# Altium PCB IRIS2_PCB_CPU.PcbDoc (part 2 of 2)
Units mil, origin at the board's own origin, x right, y up, seen from the top; angles counter-clockwise.
Board outline 3935 x 3935 mil, 4 copper layers (Top Layer, GND, Power, Bottom Layer), stack 67.17 mil thick; 109 components, 87 nets, 432 pads, 298 vias.
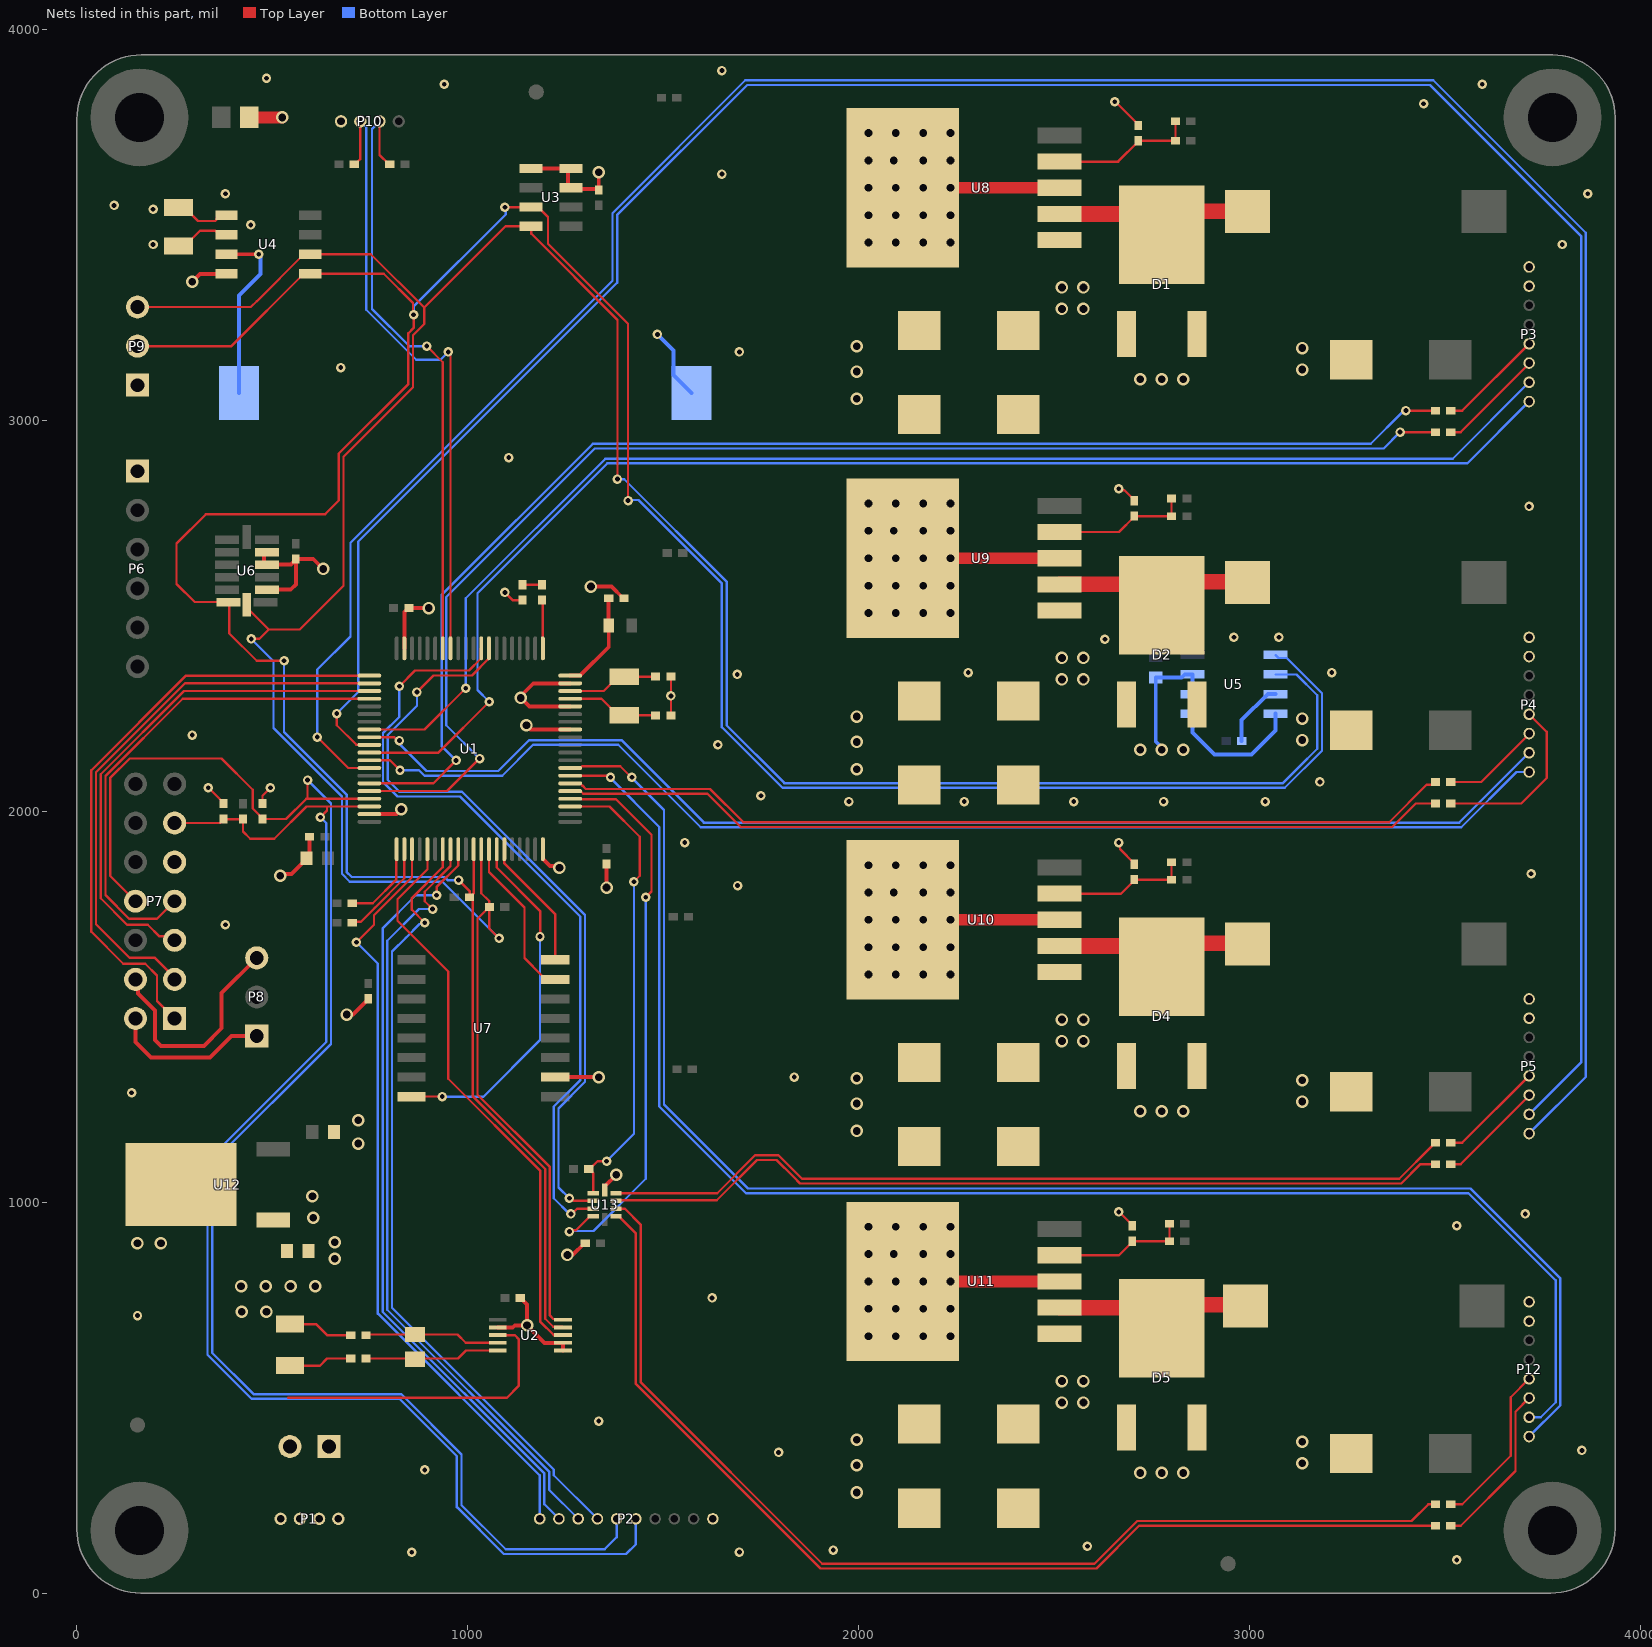
[diagram p4: the nets of this part, all layers, seen from the top]

## Via types
v1: diameter 32, hole 19.68, Top Layer to Bottom Layer, tented both sides, 175 vias
v2: diameter 24.2, hole 12.2, Top Layer to Bottom Layer, tented both sides, 123 vias

## Nets (pads, with @x,y where several pads share a name; then routed paths per layer and width w, separated by ;. In a path a pad name is that pad's centre, name@x,y a point inside that pad or via, vN(x,y) a via of type N, cw(c..) or ccw(c..) an arc to the next point about the centre after c; other vN are vias at no path point) (continued)
GND: C1.2 C2.2 C4.2 C5.2 C6.2 C7.2 C8.1 C9.1 C10.2 C11.2 C12.2 C13.2 C14.2 C15.2 C16.2 C17.2 C18.2 C19.2 C20.2 C21.2 C22.2 C23.2 C24.2 C25.2 C26.2 C27.2 C28.2 C29.2 D1.1 D1.3 D2.1 D2.3 D3.1 D4.1 D4.3 D5.1 D5.3 P1.1 P1.2 P1B.1 P2.1 P3.1 P3.2 P4.1 P4.2 P5.1 P5.2 P6.1 P7.9 P9.1 P10.1 P11.1 P12.1 P12.2 R10.2 R24.1 R29.1 R31.1 R33.1 R35.1 U1.19 U1.39 U1.60 U1.73 U1.76 U1.79 U2.1 U2.2 U2.7 U3.3 U3.4 U3.5 U4.4 U5.4 U5.5 U5.6 U5.7 U6.2 U6.4 U6.5 U7.10 U8.3 U8.6 U9.3 U9.6 U10.3 U10.6 U11.3 U11.6 U12.4 U13.5 | length 12999.6
  Top Layer w6: v2@335,2060 336.65,2060 375,2021.65 C16.2@375,2019.69 ; R10.2@475,2019.69 475,2040 v2(495,2060) ; v1@657.5,855 v1(660,855) ; v2(1095,2560) 1114.68,2540.32 D3.1@1140,2540.32 ; C19.2@1519.69,2245 C18.2@1519.69,2345 ; v1(2025,657.36) U11.6@2130,762.36 ; v1(2025,727.36) 2060,762.36 2095,762.36 U11.6@2130,797.36 ; v1(2025,797.36) v1(2095,797.36) ; v1(2025,867.36) v1(2095,797.36) ; v1(2025,937.36) 2057.5,904.86 2057.5,869.86 U11.6@2090,837.36 ; v1(2025,1582.36) U10.6@2130,1687.36 ; v1(2025,1652.36) 2060,1687.36 2095,1687.36 U10.6@2130,1722.36 ; v1(2025,1722.36) v1(2095,1722.36) ; v1(2025,1792.36) v1(2095,1722.36) ; v1(2025,1862.36) 2057.5,1829.86 2057.5,1794.86 U10.6@2090,1762.36 ; v1(2025,2507.36) U9.6@2130,2612.36 ; v1(2025,2577.36) 2060,2612.36 2095,2612.36 U9.6@2130,2647.36 ; v1(2025,2647.36) v1(2095,2647.36) ; v1(2025,2717.36) v1(2095,2647.36) ; v1(2025,2787.36) 2057.5,2754.86 2057.5,2719.86 U9.6@2090,2687.36 ; v1(2025,3455) U8.6@2130,3560 ; v1(2025,3525) 2060,3560 2095,3560 U8.6@2130,3595 ; v1(2025,3595) v1(2095,3595) ; v1(2025,3665) v1(2095,3595) ; v1(2025,3735) 2057.5,3702.5 2057.5,3667.5 U8.6@2090,3635 ; v1(2090,867.36) U11.6@2090,837.36 ; v1(2090,1792.36) U10.6@2090,1762.36 ; v1(2090,2717.36) U9.6@2090,2687.36 ; v1(2090,3665) U8.6@2090,3635 ; v1(2095,657.36) 2130,692.36 U11.6@2130,762.36 ; v1(2095,937.36) U11.6@2095,832.36 ; v1(2095,1582.36) 2130,1617.36 U10.6@2130,1687.36 ; v1(2095,1862.36) U10.6@2095,1757.36 ; v1(2095,2507.36) 2130,2542.36 U9.6@2130,2612.36 ; v1(2095,2787.36) U9.6@2095,2682.36 ; v1(2095,3455) 2130,3490 U8.6@2130,3560 ; v1(2095,3735) U8.6@2095,3630 ; v1(2165,727.36) U11.6@2165,762.36 ; v1(2165,797.36) v1(2235,727.36) ; v1(2165,937.36) 2130,902.36 U11.6@2130,832.36 ; v1(2165,1652.36) U10.6@2165,1687.36 ; v1(2165,1722.36) v1(2235,1652.36) ; v1(2165,1862.36) 2130,1827.36 U10.6@2130,1757.36 ; v1(2165,2577.36) U9.6@2165,2612.36 ; v1(2165,2647.36) v1(2235,2577.36) ; v1(2165,2787.36) 2130,2752.36 U9.6@2130,2682.36 ; v1(2165,3525) U8.6@2165,3560 ; v1(2165,3595) v1(2235,3525) ; v1(2165,3735) 2130,3700 U8.6@2130,3630 ; U11.6@2170,657.36 U11.6@2170,757.36 ; U10.6@2170,1582.36 U10.6@2170,1682.36 ; U9.6@2170,2507.36 U9.6@2170,2607.36 ; U8.6@2170,3455 U8.6@2170,3555 ; v1(2235,867.36) 2200,832.36 2165,832.36 U11.6@2130,797.36 ; v1(2235,937.36) U11.6@2130,832.36 ; v1(2235,1792.36) 2200,1757.36 2165,1757.36 U10.6@2130,1722.36 ; v1(2235,1862.36) U10.6@2130,1757.36 ; v1(2235,2717.36) 2200,2682.36 2165,2682.36 U9.6@2130,2647.36 ; v1(2235,2787.36) U9.6@2130,2682.36 ; v1(2235,3665) 2200,3630 2165,3630 U8.6@2130,3595 ; v1(2235,3735) U8.6@2130,3630 ; U11.6@2240,657.36 2205,692.36 2205,722.36 U11.6@2170,757.36 ; U10.6@2240,1582.36 2205,1617.36 2205,1647.36 U10.6@2170,1682.36 ; U9.6@2240,2507.36 2205,2542.36 2205,2572.36 U9.6@2170,2607.36 ; U8.6@2240,3455 2205,3490 2205,3520 U8.6@2170,3555 ; v2(2655,3815) 2656.65,3815 2715,3756.65 R29.1@2715,3754.68 ; v2(2665,975) 2666.34,975 2699.69,941.65 R35.1@2699.69,939.68 ; v2(2665,1920) 2668.48,1916.52 2668.48,1903.17 2705,1866.65 R33.1@2705,1864.68 ; v2(2665,2825) 2668.48,2821.52 2680.14,2821.52 2705,2796.65 R31.1@2705,2794.68 ; U11.6@2090,837.36 U11.6@2095,832.36 ; U10.6@2090,1762.36 U10.6@2095,1757.36 ; U9.6@2090,2687.36 U9.6@2095,2682.36 ; U8.6@2090,3635 U8.6@2095,3630 ; v1(2095,797.36) U11.6@2130,797.36 ; U11.6@2095,832.36 U11.6@2130,797.36 ; v1(2095,1722.36) U10.6@2130,1722.36 ; U10.6@2095,1757.36 U10.6@2130,1722.36 ; v1(2095,2647.36) U9.6@2130,2647.36 ; U9.6@2095,2682.36 U9.6@2130,2647.36 ; v1(2095,3595) U8.6@2130,3595 ; U8.6@2095,3630 U8.6@2130,3595 ; U11.6@2130,762.36 U11.6@2130,797.36 ; U11.6@2130,797.36 U11.6@2165,762.36 ; U11.6@2130,797.36 U11.6@2130,832.36 ; U10.6@2130,1687.36 U10.6@2130,1722.36 ; U10.6@2130,1722.36 U10.6@2165,1687.36 ; U10.6@2130,1722.36 U10.6@2130,1757.36 ; U9.6@2130,2612.36 U9.6@2130,2647.36 ; U9.6@2130,2647.36 U9.6@2165,2612.36 ; U9.6@2130,2647.36 U9.6@2130,2682.36 ; U8.6@2130,3560 U8.6@2130,3595 ; U8.6@2130,3595 U8.6@2130,3630 ; U8.6@2130,3595 U8.6@2165,3560 ; U11.6@2165,762.36 U11.6@2170,757.36 ; U10.6@2165,1687.36 U10.6@2170,1682.36 ; U9.6@2165,2612.36 U9.6@2170,2607.36 ; U8.6@2165,3560 U8.6@2170,3555
  Top Layer w10: v1(295,3355) 315,3375 U4.4@382.72,3375 ; U6.2@478.31,2567.17 547.17,2567.17 560,2580 C6.2@560,2643.35 ; U6.5@478.31,2662.83 478.31,2630.94 547.6,2630.94 C6.2@560,2643.35 ; v1(520,1835) 524.21,1839.21 548.62,1839.21 587.44,1878.03 C12.2@587.44,1880 595.31,1887.87 C13.2@595.31,1935 ; v1(630,2620) 604.69,2645.31 C6.2@560,2645.31 C6.2@560,2643.35 ; v1(690,1480) 706.65,1480 745,1518.35 C25.2@745,1520.31 ; U1.39@748.11,1992.68 817.68,1992.68 v1(830,2005) ; U1.19@837.68,2416.89 837.68,2510.28 847.4,2520 C23.2@849.37,2520 v1(900,2520) ; U2.7@1076.34,679.68 1115.06,679.68 1120.22,684.84 v1(1151.54,684.84) ; C8.1@1134.37,755 1136.34,755 1141.18,750.16 1141.18,748.19 1151.54,737.83 v1(1151.54,684.84) ; v1(1150,2220) 1160.79,2209.21 U1.73@1261.89,2209.21 ; U3.5@1170,3644.21 1256.61,3644.21 1256.61,3595 1259.27,3592.34 1332.34,3592.34 C1.2@1335,3589.69 v1(1335,3635) ; U1.60@1192.01,1903.11 1192.01,1877.68 1209.95,1859.73 1230.27,1859.73 v1(1234.48,1855.52) ; U7.10@1224.06,1320 v1(1335,1320) ; U2.1@1243.66,620.63 U2.2@1243.66,640.31 1196.07,640.31 v1(1151.54,684.84) ; v1(1255,865) 1268.35,865 1298.35,895 C26.2@1300.31,895 ; U1.76@1261.89,2268.27 1157.48,2268.27 1135.75,2290 v1(1135.38,2290) 1135.38,2295.38 1167.32,2327.32 U1.79@1261.89,2327.32 ; v1(1315,2575) 1367.72,2575 1397.72,2545 C20.2@1399.69,2545 ; U13.5@1350,1030.87 1350,1040.31 1379.69,1070 v1(1380,1070) ; v1(1355,1805) C11.2@1355,1865.31
  Top Layer w30: R24.1@440.43,3775 v1(525,3775) ; U11.6@2130,797.36 v1(2165,797.36) U11.3@2531.57,797.36 ; U10.6@2130,1722.36 v1(2165,1722.36) U10.3@2531.57,1722.36 ; U9.6@2130,2647.36 v1(2165,2647.36) U9.3@2531.57,2647.36 ; U8.6@2130,3595 v1(2165,3595) U8.3@2531.57,3595 ; U11.6@2165,782.36 U11.6@2235,782.36 ; U10.6@2165,1707.36 U10.6@2235,1707.36 ; U9.6@2165,2632.36 U9.6@2235,2632.36 ; U8.6@2165,3580 U8.6@2235,3580
  Bottom Layer w10: v2(1485,3220) 1526.3,3178.7 1526.3,3116.18 P11.1@1572.48,3070 ; v1(2775,2157.36) 2775,2163.32 2760,2178.32 C2.2@2760,2342.44 2826.46,2342.44 2834.02,2350 U5.7@2853.7,2350 U5.6@2853.7,2300 U5.5@2853.7,2250 2853.7,2201.3 2910,2145 3005,2145 3066.3,2206.3 U5.4@3066.3,2250
  other v1: 1995,257.36 2720,307.36 2775,307.36 2830,307.36 1995,327.36 3135,332.36 3135,387.36 1995,392.36 2165,657.36 2235,657.36 2095,727.36 2235,797.36 2165,867.36 155,895 215,895 660,897.5 720,1150 1995,1182.36 720,1210 2720,1232.36 2775,1232.36 2830,1232.36 1995,1252.36 3135,1257.36 3135,1312.36 1995,1317.36 2165,1582.36 2235,1582.36 2095,1652.36 2235,1722.36 2165,1792.36 1995,2107.36 2720,2157.36 2830,2157.36 1995,2177.36 3135,2182.36 3135,2237.36 1995,2242.36 2165,2507.36 2235,2507.36 2095,2577.36 2235,2647.36 2165,2717.36 1995,3055 2720,3105 2775,3105 2830,3105 1995,3125 3135,3130 3135,3185 1995,3190 2165,3455 2235,3455 2095,3525 2235,3595 2165,3665
  other v2: 3530,85 856.88,104.26 1695,105 1935,110 2585,120 890,315 1795,360 3850,365 1335,440 155,710 1625,755 3530,940 3705,970 140,1280 1835,1320 380,1710 1690,1810 3720,1840 1555,1920 1975,2025 2270,2025 2550,2025 2780,2025 3040,2025 1750,2040 335.83,2060 3180,2075 1640,2170 295,2195 1519.69,2295 1689.1,2350 2280,2355 3210,2355 2630,2440 2960,2445 3075,2445 3715,2780 1105,2905 675,3135 1695,3175 195,3450 3800,3450 445,3500 195,3540 95,3550 380,3580 3865,3580 1650,3630 3445,3810 940,3860 3595,3860 485,3875 1650,3895
I2C_Ext_SCL: P10.3 R22.2 U1.14 | length 1579.4
  Top Layer w6: P10.3@774.21,3765 774.21,3679.13 798.35,3655 R22.2@800.31,3655 ; v2(895,3190) 936.1,3148.9 U1.14@936.1,2416.89
  Bottom Layer w6: P10.3@774.21,3765 774.21,3764.43 755,3745.21 755,3285 850,3190 v2(895,3190)
I2C_Ext_SDA: P10.2 R23.2 U1.13 | length 1637.5
  Top Layer w6: R23.2@709.69,3655 711.65,3655 725,3668.35 P10.2@725,3765 ; v2(950,3175) 950,3170.07 955.79,3164.29 U1.13@955.79,2416.89
  Bottom Layer w6: P10.2@725,3765 740,3749.97 740,3283.03 868.03,3155 930,3155 v2(950,3175)
I2C_SCK: P9.3 R2.2 U1.52 U2.5 U3.8 U4.6 U5.2 U6.14 | length 8328.9
  Top Layer w6: P9.3@155,3290 445,3290 460,3305 460.55,3305 580.55,3425 U4.6@597.28,3425 751.97,3425 888.49,3288.49 ; U6.14@435,2520.61 442.83,2512.78 490.61,2465 ; v2(445.98,2440.98) 446.48,2441.48 467.09,2441.48 490.61,2465 ; U1.52@1034.53,1903.11 1034.53,1790.47 1054.67,1770.33 1054.67,1754.84 R2.2@1055,1754.52 ; v2(1080,1675) 1055,1700 1055,1755 1025,1725 1025,1275 1210,1090 1210,710 1218.71,701.29 1241.74,701.29 U2.5@1243.66,699.37 ; v2(1382.9,2850) 1382.9,3257.1 1162.13,3477.87 U3.8@1162.13,3496.57 1096.57,3496.57 888.49,3288.49 ; 490.61,2465 570,2465 682,2577 682,2907 860,3085 860,3218 888.49,3246.49 888.49,3288.49
  Bottom Layer w6: v2(445.98,2440.98) 502.9,2384.07 502.9,2213.16 678,2038.06 678,1840.03 698.03,1820 935,1820 1027.42,1727.58 v2(1080,1675) ; v2(1382.9,2850) 1383.27,2849.63 1400.37,2849.63 1662,2588 1662,2219.97 1809.97,2072 3085.03,2072 3125.03,2112 3173,2159.97 3173,2297 3120,2350 U5.2@3066.3,2350
I2C_SDA: P9.2 R3.2 U1.51 U2.4 U3.7 U4.5 U5.1 U6.13 | length 8617.7
  Top Layer w6: P9.2@155,3190 395.55,3190 580.55,3375 U4.5@597.28,3375 785,3375 860,3300 860,3271.38 v2(861.38,3270) 861.38,3236.35 848,3222.97 848,3093 670,2915 670,2795 635,2760 330,2760 255,2685 255,2581.67 301.4,2535.28 395.63,2535.28 390,2529.65 390,2455 460,2385 v2(530,2385) ; v2(976.38,1824.02) 1004.69,1795.71 R3.2@1004.69,1780 R3.2@1006.65,1780 ; U1.51@1014.84,1903.11 1014.84,1790.36 1013.5,1789.01 1013.5,1786.84 R3.2@1006.65,1780 ; v2(1095,3545) U3.7@1162.13,3545 ; U3.7@1162.13,3545.79 U3.7@1162.13,3545 ; U2.4@1243.66,679.68 1241.74,681.61 1218.39,681.61 1198,702 1198,1085.03 1013,1270.03 1013,1773.65 R3.2@1006.65,1780 ; v2(1410,2795) 1410,3246.97 1205,3451.97 1205,3520.63 1188.65,3536.98 1180.63,3545 U3.7@1162.13,3545
  Bottom Layer w6: v2(530,2385) 530,2203.03 690,2043.03 690,1845 703,1832 939.97,1832 947.95,1824.02 v2(976.38,1824.02) ; v2(861.38,3270) 861.38,3291.38 1097.41,3527.41 1097.41,3542.59 v2(1095,3545) ; v2(1410,2795) 1411.51,2796.51 1436.51,2796.51 1650,2583.03 1650,2215 1805,2060 3090,2060 3185,2155 3185,2301.97 3094.8,2392.17 3074.13,2392.17 U5.1@3066.3,2400
JTAG_TCK: P7.7 U1.24 | length 1282.3
  Top Layer w6: P7.7@250,1770 205,1725 133.54,1725 73,1785.54 73,2089.97 270.98,2287.95 U1.24@748.11,2287.95
JTAG_TDI: P7.3 U1.22 | length 1444.6
  Top Layer w6: P7.3@250,1570 250,1575 200,1625 135,1625 49,1711 49,2099.91 276.41,2327.32 U1.22@748.11,2327.32
JTAG_TDO: P7.1 U1.21 | length 1567.5
  Top Layer w6: P7.1@250,1470 205,1515 205,1580 175,1610 118.63,1610 37,1691.63 37,2104.88 279.13,2347.01 U1.21@748.11,2347.01
JTAG_TMS: P7.5 U1.23 | length 1326.1
  Top Layer w6: P7.5@250,1670 240.02,1679.98 211.47,1679.98 181.46,1710 128.57,1710 61,1777.57 61,2094.94 273.7,2307.64 U1.23@748.11,2307.64
LED_BLUE: P2.9 U1.49 | length 2011.2
  Top Layer w6: v2(920,1785) 920.14,1785.14 920.14,1806.1 975.47,1861.44 U1.49@975.47,1903.11
  Bottom Layer w6: v2(920,1785) 867,1785 782,1700 782,719.97 1195.94,306.03 1195.94,227.21 P2.9@1233.15,190
LED_GREEN: P2.8 U1.48 | length 2019.5
  Top Layer w6: v2(910,1750) 890,1770 890,1794.06 955.79,1859.85 U1.48@955.79,1903.11
  Bottom Layer w6: v2(910,1750) 875,1750 794,1669 794,724.94 1207.94,311 1207.94,264.43 P2.8@1282.36,190
LED_RED: P2.7 U1.47 | length 2017.9
  Top Layer w6: v2(890,1715) 856.99,1748.01 856.99,1778.01 936.1,1857.13 U1.47@936.1,1903.11
  Bottom Layer w6: v2(890,1715) 886.52,1711.52 876.52,1711.52 841.26,1676.26 806,1641 806,729.91 1219.94,315.97 1219.94,301.64 P2.7@1331.57,190
LFXIN: C19.1 U1.77 Y2.1 | length 236.2
  Top Layer w6: U1.77@1261.89,2287.95 1342.09,2287.95 1384.25,2245.79 Y2.1@1400,2245.79 1479.53,2245.79 C19.1@1480.32,2245
LFXOUT: C18.1 U1.78 Y2.2 | length 233.9
  Top Layer w6: U1.78@1261.89,2307.64 1347.68,2307.64 1384.25,2344.21 Y2.2@1400,2344.21 1479.53,2344.21 C18.1@1480.32,2345
NetC3_1: C3.1 R5.1 U2.10 | length 346.4
  Top Layer w6: R5.1@739.68,600 863.5,600 C3.1@865,598.5 866.5,600 975,600 995.63,620.63 U2.10@1076.34,620.63
NetC3_2: C3.2 R6.1 U2.9 | length 346
  Top Layer w6: R6.1@739.68,660 741.18,661.5 C3.2@865,661.5 973.5,661.5 994.69,640.31 U2.9@1076.34,640.31
NetC20_1: C20.1 R11.2 U1.80 | length 253.8
  Top Layer w10: U1.80@1261.89,2347.01 1287.32,2347.01 1360.47,2420.16 R11.2@1360.47,2475 1360.39,2475.08 1360.39,2544.92 C20.1@1360.32,2545
NetC30_2: C30.2 R29.2 R30.2 U8.4 | length 369.6
  Top Layer w6: U8.4@2514.09,3661.93 2663.58,3661.93 2715,3713.35 R29.2@2715,3715.31 2810,3715.31 R30.2@2810.31,3715 C30.2@2810.31,3765
NetC31_2: C31.2 R31.2 R32.2 U9.4 | length 349.5
  Top Layer w6: U9.4@2514.09,2714.29 2665.95,2714.29 2705,2753.35 R31.2@2705,2755.31 2705.32,2755 R32.2@2800.31,2755 C31.2@2800.31,2800
NetC32_2: C32.2 R33.2 R34.2 U10.4 | length 347.4
  Top Layer w6: U10.4@2514.09,1789.29 2670.95,1789.29 2705,1823.35 R33.2@2705,1825.31 2705.32,1825 R34.2@2800.31,1825 C32.2@2800.31,1870
NetC33_2: C33.2 R35.2 R36.2 U11.4 | length 342.1
  Top Layer w6: U11.4@2514.09,864.29 2665.63,864.29 2699.69,898.35 R35.2@2699.69,900.31 2794.69,900.31 R36.2@2795,900 C33.2@2795,945
NetD1_4: D1.4 L1.2 U8.2 | length 419.4
  Top Layer w40: U8.2@2514.09,3528.07 D1.4@2678.66,3528.07 ; D1.4@2775,3475 2835,3535 L1.2@3005,3535
NetD2_4: D2.4 L2.2 U9.2 | length 419.4
  Top Layer w40: U9.2@2514.09,2580.43 D2.4@2678.66,2580.43 ; D2.4@2775,2527.36 2835,2587.36 L2.2@3005,2587.36
NetD3_2: D3.2 R12.1 | length 50
  Top Layer w6: D3.2@1140,2579.69 R12.1@1190,2579.68
NetD4_4: D4.4 L3.2 U10.2 | length 419.4
  Top Layer w40: U10.2@2514.09,1655.43 D4.4@2678.66,1655.43 ; D4.4@2775,1602.36 2835,1662.36 L3.2@3005,1662.36
NetD5_4: D5.4 L4.2 U11.2 | length 419.4
  Top Layer w40: U11.2@2514.09,730.43 D5.4@2678.66,730.43 ; D5.4@2775,677.36 2835,737.36 L4.2@3005,737.36
NetP1_3: P1.3 P1.4 P1B.2 R1.1 R5.2 U2.8 | length 943.1
  Top Layer w6: 540,500 1100,500 1130,530 1130,650 1120,660 U2.8@1076.34,660 ; R1.1@545,581.85 621.85,581.85 640,600 R5.2@700.31,600
NetP3_5: P3.5 R16.2 | length 271.1
  Top Layer w6: R16.2@3514.69,3025 3544.21,3025 P3.5@3715,3195.79
NetP3_6: P3.6 R17.2 | length 275
  Top Layer w6: R17.2@3514.69,2970 3540,2970 P3.6@3716.57,3146.57
NetP4_5: P4.5 R18.2 | length 454
  Top Layer w6: R18.2@3514.69,2020 3695,2020 3760,2085 3760,2203.15 P4.5@3715,2248.15
NetP4_6: P4.6 R19.2 | length 253.2
  Top Layer w6: R19.2@3514.69,2075 3592.64,2075 P4.6@3716.57,2198.94
NetP5_5: P5.5 R20.2 | length 271.1
  Top Layer w6: R20.2@3514.69,1152.36 3544.21,1152.36 P5.5@3715,1323.15
NetP5_6: P5.6 R21.2 | length 275
  Top Layer w6: R21.2@3514.69,1097.36 3540,1097.36 P5.6@3716.57,1273.94
NetP7_2: P7.2 P8.1 | length 409.4
  Top Layer w10: P7.2@150,1470 150,1410 190,1370 340,1370 395,1425 P8.1@460,1425
NetP7_4: P7.4 P8.3 | length 587.8
  Top Layer w10: P7.4@150,1570 156.49,1563.51 156.49,1533.51 200,1490 200,1415 215,1400 325,1400 370,1445 370,1535 P8.3@460,1625
NetP11_2: P11.2 U4.3 | length 462.1
  Top Layer w10: U4.3@382.72,3425 v2(465,3425)
  Bottom Layer w10: P11.2@415,3070 415,3320 470,3375 470,3420 v2(465,3425)
NetP12_5: P12.5 R27.2 | length 421.1
  Top Layer w6: R27.2@3514.69,227.36 3544.21,227.36 3668,351.15 3668,501.15 P12.5@3715,548.15
NetP12_6: P12.6 R28.2 | length 424.4
  Top Layer w6: R28.2@3514.69,172.36 3540,172.36 3680,312.36 3680,463.94 P12.6@3715,498.94
NetR4_2: R4.2 U5.3 | length 167.4
  Bottom Layer w10: R4.2@2979.69,2180 2979.69,2233.07 3046.61,2300 U5.3@3066.3,2300
NetR12_2: R12.2 U1.1 | length 124.3
  Top Layer w6: R12.2@1190,2540.31 1192.01,2538.31 U1.1@1192.01,2416.89
NetR14_1: R14.1 U1.42 | length 248.1
  Top Layer w6: R14.1@710,1717.54 726.48,1717.54 761.94,1753 837.68,1828.74 U1.42@837.68,1903.11
NetR15_1: R15.1 U1.41 | length 215.7
  Top Layer w6: R15.1@704.68,1765 756.97,1765 817.26,1825.29 817.26,1902.38 U1.41@817.99,1903.11
NetU4_1: U4.1 Y1.1 | length 144.7
  Top Layer w6: Y1.1@260,3544.21 275.75,3544.21 309.96,3510 353.66,3510 357.17,3513.51 357.17,3516.19 365.98,3525 U4.1@382.72,3525
NetU4_2: U4.2 Y1.2 | length 143.1
  Top Layer w6: Y1.2@260,3445.79 275.75,3445.79 314.96,3485 353.66,3485 354.85,3483.81 373.91,3483.81 U4.2@382.72,3475
POWER_ALERT: U1.45 U2.3 | length 1464.2
  Top Layer w6: U1.45@896.73,1903.11 896.73,1851.73 820,1775 820,1720 950,1590 950,1316.06 1185,1081.06 1185,695 1220,660 U2.3@1243.66,660
POWERCAM01_BUTTON: P3.7 U1.28 | length 3469.5
  Top Layer w6: U1.28@748.11,2209.21 889.23,2209.21 v2(995,2314.98)
  Bottom Layer w6: v2(995,2314.98) 995,2545 1352,2902 3519.64,2902 P3.7@3715,3097.36
POWERCAM01_STATUS: P3.8 U1.31 | length 3544.1
  Top Layer w6: U1.31@748.11,2150.16 925.16,2150.16 v2(1055,2280)
  Bottom Layer w6: v2(1055,2280) 1025,2310 1025,2558.03 1356.97,2890 3556.85,2890 P3.8@3715,3048.15
POWERCAM02_BUTTON: P4.7 U1.29 | length 3202.2
  Top Layer w6: U1.29@748.11,2189.53 811.53,2189.53 820.07,2180.99 v2(825,2180.99)
  Bottom Layer w6: v2(825,2180.99) 825,2171.97 894.07,2102.9 1077.9,2102.9 1157,2182 1393,2182 1604,1971 3536.28,1971 P4.7@3715,2149.72
POWERCAM02_STATUS: P4.8 U1.32 | length 3162.1
  Top Layer w6: U1.32@748.11,2130.47 801.06,2130.47 v2(826.53,2105)
  Bottom Layer w6: v2(826.53,2105) 875,2105 889.1,2090.9 1087.9,2090.9 1167,2170 1385,2170 1596,1959 3541.25,1959 3682.76,2100.51 P4.8@3715,2100.51
POWERCAM03_BUTTON: P5.7 U1.30 | length 6771.8
  Top Layer w6: v2(665,2250) 665,2220 714.99,2170.01 747.95,2170.01 U1.30@748.11,2169.84
  Bottom Layer w6: v2(665,2250) 720,2305 720,2690 1382,3352 1382,3525.03 1714.97,3858 3461.51,3858 3848,3471.51 3848,1357.72 P5.7@3715,1224.72
POWERCAM03_STATUS: P5.8 U1.33 | length 6975.6
  Top Layer w6: v2(615,2190) 694.21,2110.79 U1.33@748.11,2110.79
  Bottom Layer w6: v2(615,2190) 615,2362.5 700,2447.5 700,2686.97 1370,3356.97 1370,3530 1710,3870 3470,3870 3860,3480 3860,1320.51 P5.8@3715,1175.51
POWERCAM04_BUTTON: P12.7 U1.67 | length 3871.9
  Top Layer w6: U1.67@1261.89,2091.1 1354.05,2091.1 1354.56,2090.59 1361.59,2090.59 v2(1365.07,2087.1)
  Bottom Layer w6: v2(1365.07,2087.1) 1365.07,2084.93 1490,1960 1490,1245 1712,1023 3560.03,1023 3783,800.03 3783,488 3744.72,449.72 P12.7@3715,449.72
POWERCAM04_STATUS: P12.8 U1.68 | length 3957.4
  Top Layer w6: U1.68@1261.89,2110.79 1288.52,2110.79 1292.73,2115 1390,2115 1417.9,2087.1 v2(1420,2087.1)
  Bottom Layer w6: v2(1420,2087.1) 1420,2085 1502,2003 1502,1249.97 1716.97,1035 3565,1035 3795,805 3795,480.51 P12.8@3715,400.51
SBWTCK: P2.6 P7.8 R10.1 U1.37 | length 4183.4
  Top Layer w6: P7.8@150,1770 85,1835 85,2085 135,2135 370,2135 450,2055 450,2007.28 475,1982.28 R10.1@475,1980.32 535.32,1980.32 587.05,2032.05 U1.37@748.11,2032.05 ; 590,2032.05 v2(590,2080)
  Bottom Layer w6: v2(590,2080) 650,2020 650,1405 346,1101 346,614.91 451.91,509 829.94,509 984,354.94 984,224.94 1096.94,112 1350,112 1380.79,142.79 P2.6@1380.79,190
SBWTDIO: C16.1 P2.5 P7.11 R9.2 U1.38 | length 3576.7
  Top Layer w6: P7.11@250,1970 366.65,1970 375.31,1978.66 375.31,1980 R9.2@425,1980 425,1948.51 443.51,1930 505,1930 587.36,2012.36 640,2012.36 ; v2(622.9,1985) 640,2002.1 640,2012.36 ; U1.38@748.11,2012.36 640,2012.36
  Bottom Layer w6: v2(622.9,1985) 638,1969.9 638,1409.97 334,1105.97 334,609.94 446.94,497 824.97,497 972,349.97 972,219.97 1091.97,100 1405,100 1430,125 P2.5@1430,190
SPI_CLK: U1.55 U7.16 | length 337.2
  Top Layer w6: U1.55@1093.58,1903.11 1093.58,1866.42 1224.06,1735.94 U7.16@1224.06,1620
SPI_SIMO: U1.53 U7.15 | length 417.9
  Top Layer w6: U1.53@1054.21,1903.11 1054.21,1844.85 1145,1754.07 1145,1624.45 1190.64,1578.81 1199.45,1570 U7.15@1224.06,1570
SPI_SOMI: U1.54 U7.8 | length 923.1
  Top Layer w6: U7.8@855.94,1270 856.26,1270.32 v2(934.68,1270.32) ; U1.54@1073.9,1903.11 1073.9,1856.1 1185,1745 1185,1679.95 v2(1184.68,1679.64)
  Bottom Layer w6: v2@935,1270 1040,1270 1184.68,1414.68 v2(1184.68,1679.64)
SUNRISE_CMD: P2.10 U1.43 | length 1966.3
  Top Layer w6: v2(715,1665) 760,1710 760,1734.09 857.36,1831.45 U1.43@857.36,1903.11
  Bottom Layer w6: v2(715,1665) 770,1610 770,715 1183.94,301.06 P2.10@1183.94,190
UART_MUX_Enable: R25.2 U1.63 U13.6 | length 1196.8
  Top Layer w6: U1.63@1261.89,2012.36 1362.64,2012.36 1440,1935 1440,1835 v2(1425,1820) ; U13.6@1320.87,1022.99 1320.87,1073.82 1318.5,1076.19 1318.5,1078.16 R25.2@1311.65,1085 ; v2(1355,1105) 1331.65,1105 R25.2@1311.65,1085 ; R25.2@1311.65,1085 R25.2@1309.69,1085 R25.2@1311.65,1085
  Bottom Layer w6: v2(1355,1105) 1425,1175 v2(1425,1820)
UART_MUX_Selection: U1.64 U13.9 | length 1460.4
  Top Layer w6: v2(1260,925) 1263.48,928.48 1276.95,928.48 1312.4,963.94 U13.9@1320.87,963.94 ; U1.64@1261.89,2032.05 1262.62,2031.31 1291.97,2031.31 1292.28,2031 1379,2031 1470,1940 1470,1795 v2(1455,1780)
  Bottom Layer w6: v2(1260,925) 1261.42,926.42 1321.42,926.42 1455,1060 v2(1455,1780)
UART_Rx_01: R17.1 U1.36 | length 3469.7
  Top Layer w6: U1.36@748.11,2051.73 946.73,2051.73 v2(1030,2135) ; v2(3385,2970) R17.1@3475.32,2970
  Bottom Layer w6: v2(1030,2135) 945,2220 945,2548.03 1324.97,2928 3343,2928 v2(3385,2970)
UART_Rx_02: R19.1 U1.66 | length 2297.3
  Top Layer w6: U1.66@1261.89,2071.42 1287.15,2071.42 1292.92,2065.65 1293.25,2065.65 1301.9,2057 1619.97,2057 1704.97,1972 3357,1972 3453.16,2068.16 3468.47,2068.16 R19.1@3475.32,2075
UART_Rx_03: U1.9 U13.8 | length 2046.2
  Top Layer w6: v2(825,2320) 865,2360 1003.23,2360 1033.27,2390.04 1033.27,2415.64 U1.9@1034.53,2416.89 ; v2(1263.9,970) 1266.5,970 1280.12,983.62 U13.8@1320.87,983.62
  Bottom Layer w6: v2(825,2320) 825,2242.01 783,2200.01 783,2075.03 820.03,2038 980.03,2038 1288,1730.03 1288,1313 1220,1245 1220,1010 1260,970 v2(1263.9,970)
UART_Rx_Muxed_03: R21.1 U13.3 | length 2184.8
  Top Layer w6: U13.3@1379.13,1003.31 1380.83,1005 1636.97,1005 1739.97,1108 1790.03,1108 1833.03,1065 1850.03,1048 3387.92,1048 3437.29,1097.36 R21.1@3475.32,1097.36
UART_Rx_Muxed_04: R28.1 U13.1 | length 2741.1
  Top Layer w6: U13.1@1379.13,963.94 1387.6,963.94 1390.5,961.03 1390.5,959.5 1430,920 1430,535 1902,63 2608,63 2717.36,172.36 R28.1@3475.32,172.36
UART_Tx_01: R16.1 U1.35 | length 3410.2
  Top Layer w6: U1.35@748.11,2071.42 911.42,2071.42 v2(970,2130) ; v2(3400,3025) R16.1@3475.32,3025
  Bottom Layer w6: v2(970,2130) 933,2167 933,2553 1320,2940 3310,2940 v2@3390,3020
UART_Tx_02: R18.1 U1.65 | length 2276.3
  Top Layer w6: U1.65@1261.89,2051.73 1288.52,2051.73 1295.25,2045 1613.03,2045 1698.03,1960 3365,1960 3425,2020 R18.1@3475.32,2020
UART_Tx_03: U1.8 U13.7 | length 1977.9
  Top Layer w6: v2(870,2305) 912.52,2347.52 1010.44,2347.52 1054.21,2391.3 U1.8@1054.21,2416.89 ; v2(1260,1010) 1264.93,1010 1271.62,1003.31 U13.7@1320.87,1003.31
  Bottom Layer w6: v2(870,2305) 870,2270.04 795,2195.04 795,2080 825,2050 985,2050 1300,1735 1300,1308.03 1232,1240.03 1232,1038 v2(1260,1010)
UART_Tx_Muxed_03: R20.1 U13.4 | length 2200.6
  Top Layer w6: U13.4@1379.13,1022.99 1637.99,1022.99 1735,1120 1795,1120 1855,1060 3382.95,1060 3466.5,1143.55 3466.5,1145.52 3473.35,1152.36 R20.1@3475.32,1152.36
UART_Tx_Muxed_04: R27.1 U13.2 | length 2771.7
  Top Layer w6: U13.2@1379.13,983.62 1401.38,983.62 1442,943 1442,539.97 1906.97,75 2603.03,75 2712.39,184.36 3414.36,184.36 3457.36,227.36 R27.1@3475.32,227.36
VBat: C4.1 C5.1 C9.2 C14.1 C15.1 C21.1 C22.1 C27.1 C28.1 R1.2 R6.2 U8.1 U9.1 U10.1 U11.1 U12.1 | length 175.2
  Top Layer w6: R1.2@545,688.15 611.85,688.15 640,660 R6.2@700.31,660
  Top Layer w30: C28.1@2408.54,217.36 C28.1@2410,218.82 ; C22.1@2408.54,1142.36 C22.1@2410,1143.82 ; C15.1@2408.54,2067.36 C15.1@2410,2068.82 ; C5.1@2408.54,3015 C5.1@2410,3016.46
  other v1: 2520,487.36 2575,487.36 2520,542.36 2575,542.36 421.67,720 485,720 420,785 483.33,785 546.67,785 610,785 605,960 602.5,1015 2520,1412.36 2575,1412.36 2520,1467.36 2575,1467.36 2520,2337.36 2575,2337.36 2520,2392.36 2575,2392.36 2520,3285 2575,3285 2520,3340 2575,3340
pads on no net: FID1.0 FID2.0 FID3.0 P6.2 P6.3 P6.6 P7.6 P7.10 P7.12 P7.13 P7.14 U1.2 U1.3 U1.4 U1.5 U1.6 U1.7 U1.10 U1.11 U1.12 U1.15 U1.16 U1.17 U1.18 U1.25 U1.26 U1.27 U1.34 U1.44 U1.69 U1.70 U1.71 U1.72 U1.74 U1.75 U3.6 U4.7 U6.3 U6.9 U6.10 U6.11 U7.1 U7.3 U7.4 U7.5 U7.9 U7.11 U7.12 U7.13 U7.14

## Polygon pours and split planes (outlines as drawn)
5V_CAM02 on Top Layer "5V_CAM02_L01_P069" (solid, pour order 69): 3592.36,2587.36 3513.54,2508.54 3513.54,2207.36 3625,2207.36 3682.64,2265 3732.64,2265 3750,2282.36 3750,2472.36 3635,2587.36
5V_CAM03 on Top Layer "5V_CAM03_L01_P075" (solid, pour order 75): 3587.36,1662.36 3513.54,1588.54 3513.54,1282.36 3625,1282.36 3682.64,1340 3732.64,1340 3750,1357.36 3750,1547.36 3635,1662.36
5V_CAM04 on Top Layer "5V_CAM04_L01_P082" (solid, pour order 82): 3620,735 3675,680 3725,680 3745,660 3745,585 3730,570 3645,570 3645,430 3560,345 3530,345 3500,375 3500,685 3550,735
5V_CAM01 on Top Layer "5V_CAM01_L01_P063" (solid, pour order 63): 3595,3535 3513.54,3453.54 3513.54,3155 3625,3155 3685,3215 3735,3215 3750,3230 3750,3420 3635,3535
GND on Top Layer "GND_L01_P084" (solid, pour order 84): 460,3530 390,3600 210,3600 170,3560 170,3430 205,3395 315,3395 330,3410 330,3440 345,3455 425,3455 460,3490
GND on Top Layer "GND_L01_P083" (solid, pour order 83): 1261.89,2327.32 1292.32,2327.32 1355,2390 1520,2390 1550,2360 1550,2220 1525,2195 1335,2195 1320,2210 1320,2250 1301.73,2268.27 1261.89,2268.27
GND on Top Layer "GND_L01_P080" (solid, pour order 80): 3260,422.36 3235,447.36 3125,447.36 3090,412.36 3090,307.36 3135,262.36 3235,262.36 3260,287.36
GND on Top Layer "GND_L01_P079" (solid, pour order 79): 2684.84,423.43 2684.84,287.52 2710,262.36 2845,262.36 2870,287.36 2870,418.58 2865.16,423.43
VBat on Top Layer "VBAT_L01_P078" (solid, pour order 78): 2408.54,217.36 2408.54,455.91 2485,532.36 2485,667.36 2590,667.36 2605,652.36 2605,342.36 2480,217.36
GND on Top Layer "GND_L01_P077" (solid, pour order 77): 2155,432.36 1975,432.36 1950,407.36 1950,227.36 1975,202.36 2155,202.36
GND on Top Layer "GND_L01_P076" (solid, pour order 76): 2255,982.36 2230,1007.36 1755,1007.36 1722.5,974.86 1722.5,529.86 1755,497.36 2065,497.36 2175,607.36 2255,607.36
GND on Top Layer "GND_L01_P074" (solid, pour order 74): 3260,1347.36 3235,1372.36 3125,1372.36 3090,1337.36 3090,1232.36 3135,1187.36 3235,1187.36 3260,1212.36
GND on Top Layer "GND_L01_P073" (solid, pour order 73): 2684.84,1348.43 2684.84,1212.52 2710,1187.36 2845,1187.36 2870,1212.36 2870,1343.58 2865.16,1348.43
VBat on Top Layer "VBAT_L01_P072" (solid, pour order 72): 2408.54,1142.36 2408.54,1380.91 2485,1457.36 2485,1592.36 2590,1592.36 2605,1577.36 2605,1267.36 2480,1142.36
GND on Top Layer "GND_L01_P071" (solid, pour order 71): 2155,1357.36 1975,1357.36 1950,1332.36 1950,1152.36 1975,1127.36 2155,1127.36
GND on Top Layer "GND_L01_P070" (solid, pour order 70): 2255,1907.36 2230,1932.36 1755,1932.36 1722.5,1899.86 1722.5,1454.86 1755,1422.36 2065,1422.36 2175,1532.36 2255,1532.36
GND on Top Layer "GND_L01_P068" (solid, pour order 68): 3260,2272.36 3235,2297.36 3125,2297.36 3090,2262.36 3090,2157.36 3135,2112.36 3235,2112.36 3260,2137.36
GND on Top Layer "GND_L01_P067" (solid, pour order 67): 2684.84,2273.43 2684.84,2137.52 2710,2112.36 2845,2112.36 2870,2137.36 2870,2268.58 2865.16,2273.43
VBat on Top Layer "VBAT_L01_P066" (solid, pour order 66): 2408.54,2067.36 2408.54,2305.91 2485,2382.36 2485,2517.36 2590,2517.36 2605,2502.36 2605,2192.36 2480,2067.36
GND on Top Layer "GND_L01_P065" (solid, pour order 65): 2155,2282.36 1975,2282.36 1950,2257.36 1950,2077.36 1975,2052.36 2155,2052.36
GND on Top Layer "GND_L01_P064" (solid, pour order 64): 2255,2832.36 2230,2857.36 1755,2857.36 1722.5,2824.86 1722.5,2379.86 1755,2347.36 2065,2347.36 2175,2457.36 2255,2457.36
GND on Top Layer "GND_L01_P010" (solid, pour order 10): 2255,3780 2230,3805 1755,3805 1722.5,3772.5 1722.5,3327.5 1755,3295 2065,3295 2175,3405 2255,3405
GND on Top Layer "GND_L01_P025" (solid, pour order 25): 3260,3220 3235,3245 3125,3245 3090,3210 3090,3105 3135,3060 3235,3060 3260,3085
GND on Top Layer "GND_L01_P024" (solid, pour order 24): 2684.84,3221.06 2684.84,3085.16 2710,3060 2845,3060 2870,3085 2870,3216.22 2865.16,3221.06
VBat on Top Layer "VBAT_L01_P023" (solid, pour order 23): 2408.54,3015 2408.54,3253.54 2485,3330 2485,3465 2590,3465 2605,3450 2605,3140 2480,3015
GND on Top Layer "GND_L01_P022" (solid, pour order 22): 2155,3230 1975,3230 1950,3205 1950,3025 1975,3000 2155,3000
3.3V on Top Layer "3.3V_L01_P004" (solid, pour order 4): 502.32,1135.55 487.87,1150 480,1150 520,1190 520,1255 540,1275 640,1275 650,1265 650,1225 635,1210 620,1210 620,1197.56 600,1177.56 600,1150 585,1135 575,1135
GND on Top Layer "GND_L01_P006" (solid, pour order 6): 245,860 245,955 235,965 140,965 125,950 125,860
GND on Top Layer "GND_L01_P005" (solid, pour order 5): 750.52,1245 690.97,1245 655.52,1209.55 655.52,1144.55 685.06,1115 750.52,1115
VBat on Top Layer "VBAT_L01_P002" (solid, pour order 2): 505,963.9 505,890 530,865 535,870 550,870 550,925 560,935 625,935 635,945 636.67,1023.33 620,1040 581.1,1040
GND on Top Layer "GND_L01_P003" (solid, pour order 3): 685,920 605,920 590,905 590,840 600,830 685,830
VBat on Top Layer "VBAT_L01_P001" (solid, pour order 1): 640,730 640,795 615,820 410,820 375,785 375,690 390,670 550,670 590,710 620,710
NetP1_3 on Top Layer "NETP1_3_L01_P000" (solid, pour order 0): 455,100 425,130 425,425 485,485 485,585 500,600 550,600 590,560 590,445 590,100
GND on Bottom Layer "GND_L04_P086" (solid, remove dead copper, pour order 86): 3915,3640 3640.15,3914.85 300,3915 25,3640 25,295 295,25 3640,25 3915,300
GND on Bottom Layer "GND_L04_P085" (solid, remove dead copper, pour order 85): 2410,2375 2500,2465 3135,2465 3275,2325 3275,2130 3150,2005 1730,2005 1620,2115 1620,2320 1675,2375
3.3V on Power (split plane): 165,3914.9 1884.91,3914.9 1884.91,654.18 1750.82,520.09 1204.18,520.09 1170.09,554.18 1170.09,725 1169.74,727.61 1169.45,728.32 1168.73,730.04 1167.13,732.13 832.13,1067.13 830.04,1068.73 827.61,1069.74 825,1070.09 20.1,1070.09 20.1,3770 20.03,3770.66 20.38,3780.34 21.48,3790.63 23.32,3800.82 25.88,3810.85 29.15,3820.67 33.11,3830.23 37.74,3839.49 43.03,3848.39 48.93,3856.89 55.42,3864.95 62.48,3872.53 70.05,3879.58 78.11,3886.07 86.61,3891.98 95.51,3897.26 104.77,3901.89 114.33,3905.85 124.15,3909.12 134.18,3911.68 144.37,3913.52 154.66,3914.62 164.34,3914.97
VBat on Power (split plane): 3785.32,3914.63 3795.23,3913.57 3805.04,3911.8 3814.7,3909.33 3824.16,3906.19 3833.36,3902.37 3842.28,3897.91 3850.85,3892.82 3859.04,3887.14 3866.8,3880.88 3874.09,3874.09 3880.88,3866.8 3887.14,3859.04 3892.82,3850.85 3897.91,3842.28 3902.37,3833.36 3906.18,3824.16 3909.33,3814.7 3911.8,3805.04 3913.57,3795.23 3914.63,3785.32 3914.97,3776 3914.9,3775.36 3914.9,165 3914.97,164.34 3914.62,154.66 3913.52,144.37 3911.68,134.18 3909.12,124.15 3905.85,114.33 3901.89,104.77 3897.26,95.51 3891.98,86.61 3886.07,78.11 3879.58,70.05 3872.52,62.48 3864.95,55.42 3856.89,48.93 3848.39,43.03 3839.49,37.74 3830.23,33.11 3820.67,29.15 3810.85,25.88 3800.82,23.32 3790.63,21.48 3780.34,20.38 3770.66,20.03 3770,20.1 163.39,20.1 162.73,20.03 153.16,20.37 142.98,21.47 132.91,23.29 122.99,25.82 113.28,29.05 103.82,32.97 94.67,37.55 85.87,42.77 77.46,48.61 69.49,55.03 62,62 55.03,69.49 48.61,77.46 42.77,85.87 37.55,94.67 32.97,103.82 29.05,113.28 25.82,122.99 23.29,132.91 21.47,142.98 20.37,153.16 20.03,162.73 20.1,163.39 20.1,1049.91 820.82,1049.91 1149.91,720.82 1149.91,550 1150.26,547.39 1151.27,544.96 1152.87,542.87 1192.87,502.87 1194.96,501.26 1196.68,500.55 1197.39,500.26 1200,499.91 1755,499.91 1757.61,500.26 1760.04,501.26 1762.13,502.87 1902.13,642.87 1903.73,644.96 1904.74,647.39 1905.09,650 1905.09,3914.9 3775.36,3914.9 3776,3914.97
GND on GND (split plane): 165,3914.9 3775.36,3914.9 3776,3914.97 3785.32,3914.63 3795.23,3913.57 3805.04,3911.8 3814.7,3909.33 3824.16,3906.19 3833.36,3902.37 3842.28,3897.91 3850.85,3892.82 3859.04,3887.14 3866.8,3880.88 3874.09,3874.09 3880.88,3866.8 3887.14,3859.04 3892.82,3850.85 3897.91,3842.28 3902.37,3833.36 3906.18,3824.16 3909.33,3814.7 3911.8,3805.04 3913.57,3795.23 3914.63,3785.32 3914.97,3776 3914.9,3775.36 3914.9,165 3914.97,164.34 3914.62,154.66 3913.52,144.37 3911.68,134.18 3909.12,124.15 3905.85,114.33 3901.89,104.77 3897.26,95.51 3891.98,86.61 3886.07,78.11 3879.58,70.05 3872.52,62.48 3864.95,55.42 3856.89,48.93 3848.39,43.03 3839.49,37.74 3830.23,33.11 3820.67,29.15 3810.85,25.88 3800.82,23.32 3790.63,21.48 3780.34,20.38 3770.66,20.03 3770,20.1 163.39,20.1 162.73,20.03 153.16,20.37 142.98,21.47 132.91,23.29 122.99,25.82 113.28,29.05 103.82,32.97 94.67,37.55 85.87,42.77 77.46,48.61 69.49,55.03 62,62 55.03,69.49 48.61,77.46 42.77,85.87 37.55,94.67 32.97,103.82 29.05,113.28 25.82,122.99 23.29,132.91 21.47,142.98 20.37,153.16 20.03,162.73 20.1,163.39 20.1,3770 20.03,3770.66 20.38,3780.34 21.48,3790.63 23.32,3800.82 25.88,3810.85 29.15,3820.67 33.11,3830.23 37.74,3839.49 43.03,3848.39 48.93,3856.89 55.42,3864.95 62.48,3872.53 70.05,3879.58 78.11,3886.07 86.61,3891.98 95.51,3897.26 104.77,3901.89 114.33,3905.85 124.15,3909.12 134.18,3911.68 144.37,3913.52 154.66,3914.62 164.34,3914.97

## Keep-outs
Keep-Out Layer:
  the board outline again, w10

## Other copper
Power (plane layer: these items are gaps in the copper):
  lines w20: 0,1060 825,1060 1160,725 1160,550 1200,510 1755,510 1895,650 1895,3935

## Silkscreen, mask and mechanical layers (free items; w line width, h text height)
Top Overlay:
  circle w6: c425,2930 r20
  lines w6: 425,2910 425,2835 ; 435,2845 425,2835 ; 445,2930 515,2930 ; 505,2940 515,2930 ; 425,2835 415,2845 425,2835 ; 515,2930 505,2920 515,2930
  text "I2C Ext" at 657,3867 h30
  text "SCK" at 227,3272 h30
  text "IRIS 2 CPU" at 815.17,3206.67 h200
  text "SDA" at 227,3172 h30
  text "I2C Int" at 73,3112 h30 r90
  text "V1.3 - 2021" at 985,3105 h40
  text "Camera 01" at 3863,3082 h30 r90
  text "GND" at 227,3077 h30
  text "Daedalus Team" at 815.07,2985.67 h80
  text "z" at 416,2966 h30
  text "y" at 501,2966 h30
  text "." at 420,2925.22 h30
  text "sondasespaciales.com" at 815,2920.92 h80
  text "GND" at 227,2852 h30
  text "x" at 451,2836 h30
  text "Rx" at 227,2552 h30
  text "UART Debug" at 68,2457 h30 r90
  text "Tx" at 227,2452 h30
  text "Camera 02" at 3863,2132 h30 r90
  text "JTAG" at 73,1712 h30 r90
  text "Vcc Tgt" at 532,1627 h30
  text "3V3" at 537,1512 h30
  text "Vcc Tool" at 532,1382 h30
  text "Camera 03" at 3863,1222 h30 r90
  text "Vin" at 548,452 h30 r90
  text "GND" at 663,447 h30 r90
  text "Camera 04" at 3863,432 h30 r90
  text "FP Power In" at 442,52 h30
  text "FP Interface" at 1247,52 h30
Bottom Overlay:
  text "CR2032 / RTC Battery" at 2010,3290 h40
  text "Image Recorder / Instrument for Sunrise" at 3291.78,1670 h200
  text "IRIS 2 CPU" at 2939.83,1376.67 h200
  text "V1.3 - 2021" at 2725,1280 h40
  text "Daedalus Team" at 2889.93,1145.67 h80
  text "sondasespaciales.com" at 2890,1080.92 h80
Mechanical 13:
  lines w10: 0,163.39 ccw(c163.39,163.39) 163.39,0

## Text inside footprints (layer, text, board x,y; h text height)
P7: Top Overlay "2" at 165,1380 h30 r90; Top Overlay "1" at 270,1385 h30 r90; Top Overlay "14" at 170,2150 h30 r90; Top Overlay "13" at 270,2150 h30 r90